# Altium PCB m_airconditioner_PCB.PcbDoc
Units mm, origin at the board's own origin, x right, y up, seen from the top; angles counter-clockwise.
Board outline 200 x 180 mm, 2 copper layers (Top Layer, Bottom Layer); 139 components, 155 nets, 583 pads, 53 vias.
Unrouted connection lines stored in the file: 1.
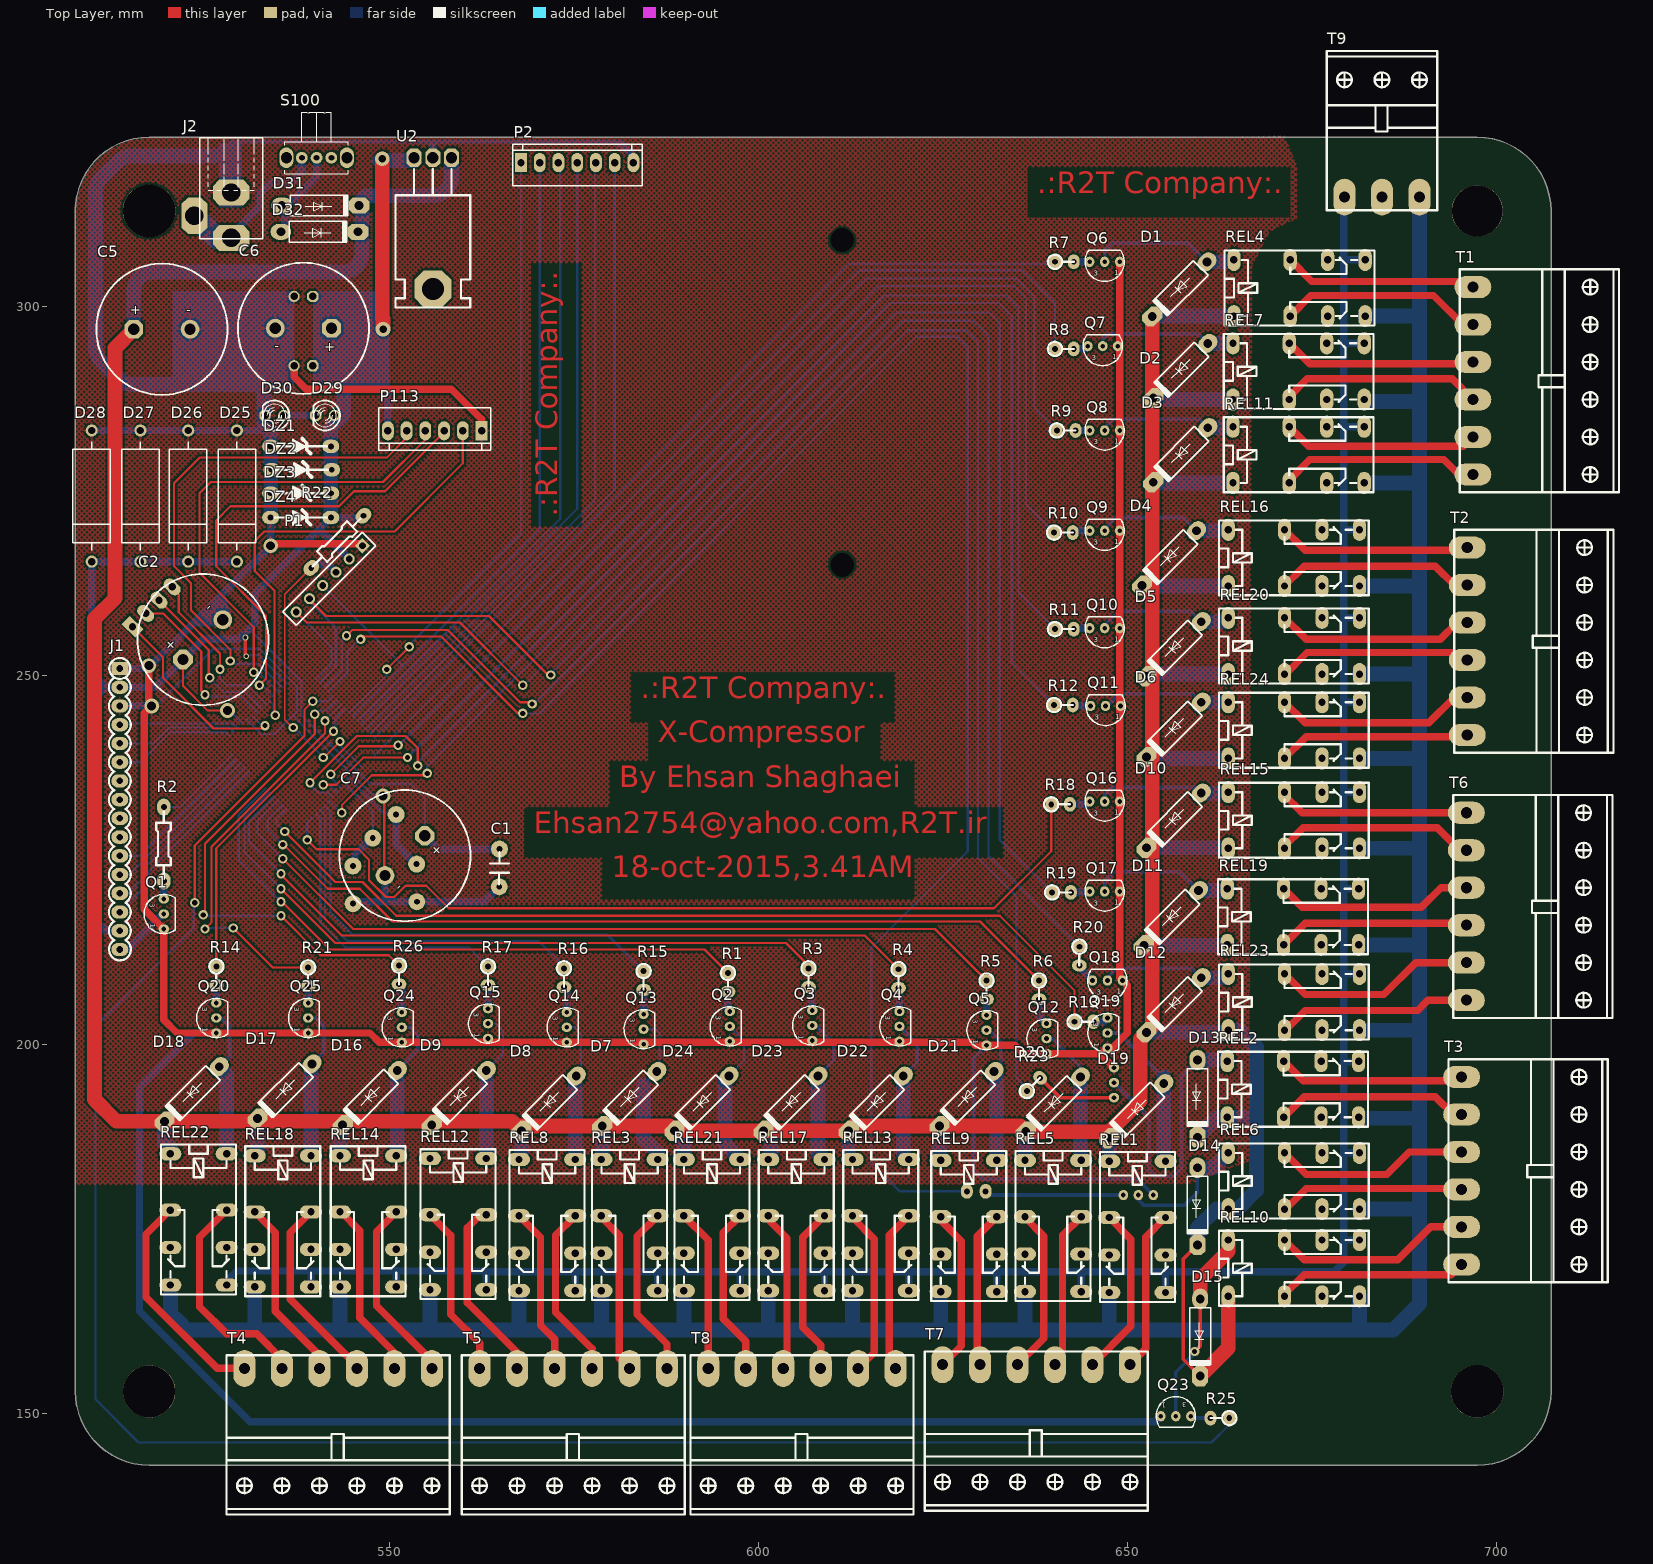
[diagram p0: Top Layer view]
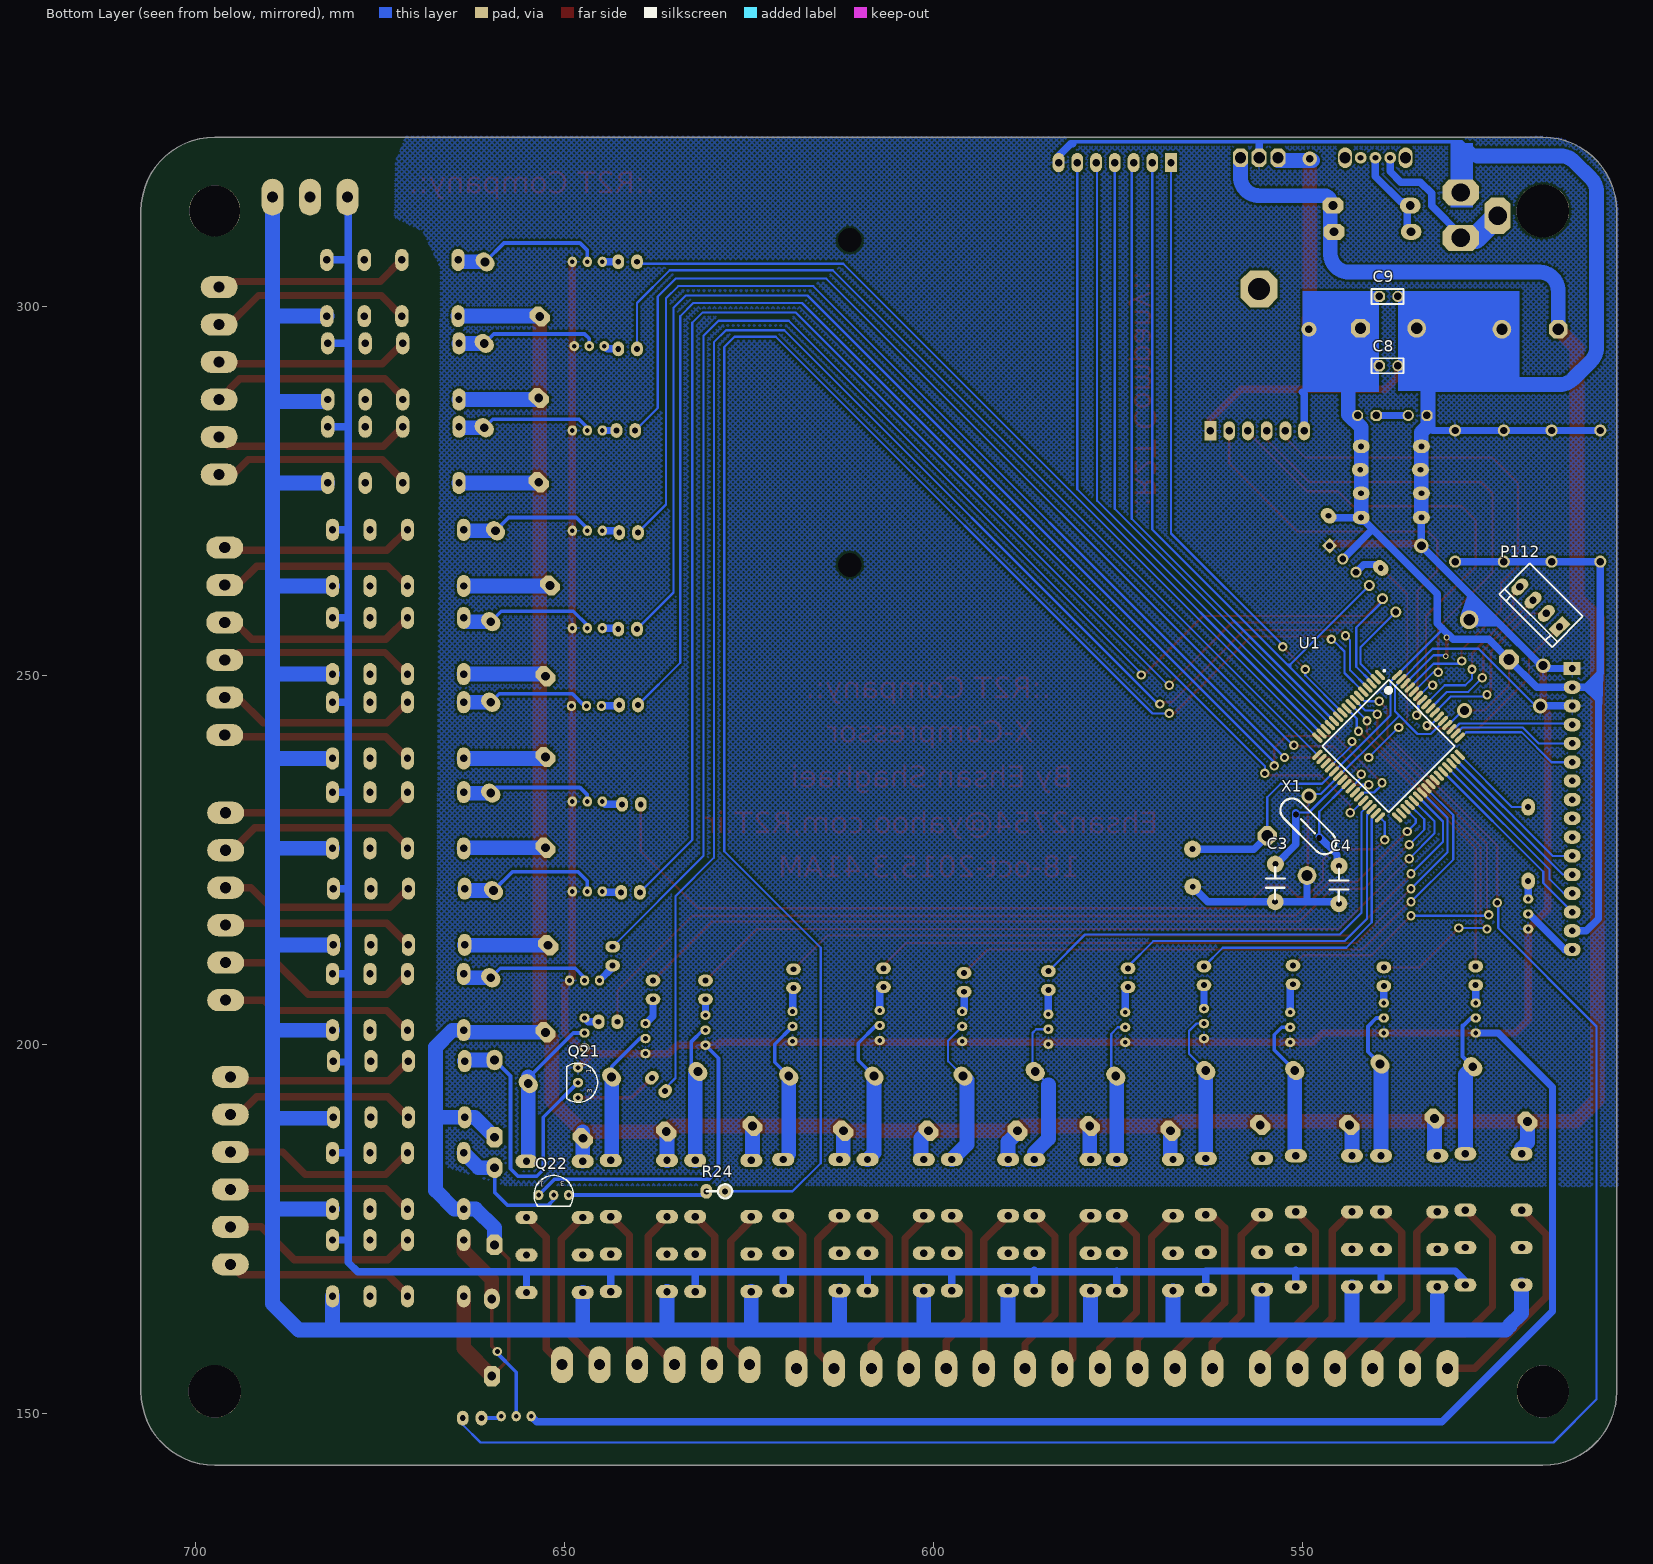
[diagram p1: Bottom Layer view, seen from below]

## Layer stack, top to bottom
Top Solder: solder mask 0.0102, Solder Resist, Dk 3.5
Top Layer: signal copper 0.0356
Dielectric 1: dielectric 0.32, FR-4, Dk 4.8
Bottom Layer: signal copper 0.0356
Bottom Solder: solder mask 0.0102, Solder Resist, Dk 3.5

## Board outline
707.441,312.961 707.386,314.006 707.222,315.04 706.952,316.051 706.576,317.028 706.101,317.961 705.531,318.839 704.872,319.652 704.132,320.392 703.319,321.051 702.441,321.621 701.508,322.097 700.531,322.472 699.52,322.743 698.486,322.906 697.441,322.961 517.441,322.961 516.396,322.906 515.362,322.742 514.351,322.472 513.374,322.096 512.441,321.621 511.563,321.051 510.75,320.392 510.01,319.652 509.351,318.839 508.781,317.961 508.306,317.028 507.93,316.051 507.66,315.04 507.496,314.006 507.441,312.961 507.441,152.961 507.496,151.916 507.66,150.882 507.93,149.871 508.306,148.894 508.781,147.961 509.351,147.083 510.01,146.27 510.75,145.53 511.563,144.871 512.441,144.301 513.374,143.826 514.351,143.45 515.362,143.18 516.396,143.016 517.441,142.961 697.441,142.961 698.486,143.016 699.52,143.18 700.531,143.45 701.508,143.826 702.441,144.301 703.319,144.871 704.132,145.53 704.872,146.27 705.531,147.083 706.101,147.961 706.576,148.894 706.952,149.871 707.222,150.882 707.386,151.916 707.441,152.961

## Design rules (kind name [scope] priority, off if disabled: settings)
Clearance [All] p1: gap=0.254
PolygonConnect [All] p1: connectstyle=Relief reliefconductorwidth=0.254 reliefentries=4 polygonreliefangle="90 Angle" airgapwidth=0.254
RoutingVias [All] p1: holewidth=0.711 width=1.27 viastyle="Through Hole" minholewidth=0.711 minwidth=1.27 maxholewidth=0.711 maxwidth=1.27
SolderMaskExpansion [All] p1: expansion=0.102
Width [All] p1: maxlimit=3 minlimit=0.2 preferedwidth=0.5
29 further rules are at their usual default settings.

## Components (designator, comment, footprint, x,y, rotation, side; value= is the part's Value field where it differs from the comment)
C1 "" RAD_ADA 564.896,221.361 r90 top
C2 "Cap" My_cap3300u 527.431,257.556 r45 top
C3 "CAP" RAD_ADA 553.72,219.329 r90 bottom
C4 "CAP" RAD_ADA 545.084,219.075 r90 bottom
C5 "Cap" My_cap3300u 522.986,296.926 r0 top
C6 "Cap" My_cap3300u 534.543,297.053 r180 top
C7 "Cap" My_cap3300u 549.402,222.885 r225 top
C8 "Cap" My_cap100n 538.353,291.973 r180 bottom
C9 "Cap" My_cap100n 538.353,301.371 r180 bottom
D1 "1N4007" My_DO-41 653.415,298.323 r45 top
D2 "1N4007" My_DO-41 653.542,287.274 r45 top
D3 "1N4007" My_DO-41 653.542,275.844 r45 top
D4 "1N4007" My_DO-41 652.018,261.874 r45 top
D5 "1N4007" My_DO-41 652.653,249.555 r45 top
D6 "1N4007" My_DO-41 652.653,238.633 r45 top
D7 "1N4007" My_DO-41 578.866,188.595 r45 top
D8 "1N4007" My_DO-41 567.944,187.96 r45 top
D9 "1N4007" My_DO-41 555.752,188.722 r45 top
D10 "1N4007" My_DO-41 652.653,226.314 r45 top
D11 "1N4007" My_DO-41 652.272,213.106 r45 top
D12 "1N4007" My_DO-41 652.653,201.295 r45 top
D13 "1N4007" My_DO-41 659.765,187.198 r90 top
D14 "1N4007" My_DO-41 659.765,172.593 r90 top
D15 "1N4007" My_DO-41 660.146,154.813 r90 top
D16 "1N4007" My_DO-41 543.687,188.722 r45 top
D17 "1N4007" My_DO-41 532.13,189.611 r45 top
D18 "1N4007" My_DO-41 519.557,189.23 r45 top
D19 "1N4007" My_DO-41 647.573,186.944 r45 top
D20 "1N4007" My_DO-41 636.27,187.833 r45 top
D21 "1N4007" My_DO-41 624.586,188.595 r45 top
D22 "1N4007" My_DO-41 612.267,187.96 r45 top
D23 "1N4007" My_DO-41 600.71,187.96 r45 top
D24 "1N4007" My_DO-41 588.645,187.96 r45 top
D25 "5V" DIODE-0.7 529.336,274.32 r270 top
D26 "5v" DIODE-0.7 522.732,274.32 r270 top
D27 "5V" DIODE-0.7 516.255,274.32 r270 top
D28 "5V" DIODE-0.7 509.651,274.32 r270 top
D29 "LED" My_LED3MM 541.274,285.242 r180 top
D30 "LED" My_LED3MM 534.416,285.242 r180 top
D31 "1N4007" My_DO-41 546.1,313.944 r180 top
D32 "1N4007" My_DO-41 545.973,310.388 r180 top
DZ1 "ZENER" ZENER 533.908,281.051 r0 top
DZ2 "ZENER" ZENER 534.035,277.876 r0 top
DZ3 "ZENER" ZENER 533.908,274.701 r0 top
DZ4 "ZENER" ZENER 533.908,271.399 r0 top
J1 "SIP16" SIP16 513.461,250.952 r270 top
J2 "DC_Jack" My_DC_Jack 528.574,317.881 r180 top
P1 "Programmer" HDR1X6 546.354,267.589 r225 top
P2 "LHWR" "Polarized Header 7" 575.437,319.913 r0 top
P112 "LHWR" "Polarized Header 4" 518.033,259.188 r45 bottom
P113 "LHWR" "Polarized Header 6" 556.133,282.956 r180 top
Q1 "C945" C945 519.43,217.678 r270 top
Q2 "C945" C945 596.138,202.438 r270 top
Q3 "C945" C945 607.314,202.565 r270 top
Q4 "C945" C945 619.125,202.438 r270 top
Q5 "C945" C945 630.936,201.93 r270 top
Q6 "C945" C945 646.938,306.07 r0 top
Q7 "C945" C945 646.684,294.64 r0 top
Q8 "C945" C945 646.938,283.21 r0 top
Q9 "C945" C945 646.938,269.621 r0 top
Q10 "C945" C945 646.938,256.413 r0 top
Q11 "C945" C945 647.065,245.872 r0 top
Q12 "C945" C945 639.064,200.787 r270 top
Q13 "C945" C945 584.454,202.057 r270 top
Q14 "C945" C945 574.04,202.311 r270 top
Q15 "C945" C945 563.372,202.819 r270 top
Q16 "C945" C945 646.938,232.918 r0 top
Q17 "C945" C945 646.938,220.726 r0 top
Q18 "C945" C945 647.319,208.661 r0 top
Q19 "C945" C945 647.319,201.549 r270 top
Q20 "C945" C945 526.542,203.581 r270 top
Q21 "C945" C945 648.208,194.818 r90 bottom
Q22 "C945" C945 651.51,179.578 r0 bottom
Q23 "C945" C945 656.59,149.606 r180 top
Q24 "C945" C945 551.688,202.311 r270 top
Q25 "C945" C945 538.988,203.581 r270 top
R1 "RES" AXIAL_V 595.884,209.677 r270 top
R2 "RES" AXIAL0.4 519.43,232.156 r270 top
R3 "RES" AXIAL_V 606.806,210.312 r270 top
R4 "RES" AXIAL_V 618.998,210.185 r270 top
R5 "RES" AXIAL_V 630.936,208.661 r270 top
R6 "RES" AXIAL_V 638.048,208.661 r270 top
R7 "RES" AXIAL_V 640.207,306.07 r0 top
R8 "RES" AXIAL_V 640.207,294.259 r0 top
R9 "RES" AXIAL_V 640.461,283.21 r0 top
R10 "RES" AXIAL_V 640.08,269.367 r0 top
R11 "RES" AXIAL_V 640.207,256.286 r0 top
R12 "RES" AXIAL_V 640.08,245.999 r0 top
R13 "RES" AXIAL_V 642.874,203.073 r0 top
R14 "RES" AXIAL_V 526.542,210.566 r270 top
R15 "RES" AXIAL_V 584.454,209.931 r270 top
R16 "RES" AXIAL_V 573.659,210.312 r270 top
R17 "RES" AXIAL_V 563.372,210.566 r270 top
R18 "RES" AXIAL_V 639.699,232.537 r0 top
R19 "RES" AXIAL_V 639.826,220.599 r0 top
R20 "RES" AXIAL_V 643.509,213.233 r270 top
R21 "RES" AXIAL_V 538.988,210.439 r270 top
R22 "RES" AXIAL0.4 546.481,271.653 r225 top
R23 "RES" AXIAL_V 636.397,193.675 r45 top
R24 "RES" AXIAL_V 628.269,180.086 r0 bottom
R25 "RES" AXIAL_V 663.829,149.352 r180 top
R26 "RES" AXIAL_V 551.307,210.693 r270 top
REL1 "RELAY" RELAY1 647.573,184.15 r270 top
REL2 "RELAY" RELAY1 663.575,190.119 r0 top
REL3 "RELAY" RELAY1 578.739,184.404 r270 top
REL4 "RELAY" RELAY1 664.464,298.704 r0 top
REL5 "RELAY" RELAY1 636.143,184.277 r270 top
REL6 "RELAY" RELAY1 663.702,177.673 r0 top
REL7 "RELAY" RELAY1 664.337,287.401 r0 top
REL8 "RELAY" RELAY1 567.563,184.404 r270 top
REL9 "RELAY" RELAY1 624.713,184.277 r270 top
REL10 "RELAY" RELAY1 663.702,165.862 r0 top
REL11 "RELAY" RELAY1 664.337,276.098 r0 top
REL12 "RELAY" RELAY1 555.498,184.531 r270 top
REL13 "RELAY" RELAY1 612.775,184.404 r270 top
REL14 "RELAY" RELAY1 543.306,184.912 r270 top
REL15 "RELAY" RELAY1 663.702,226.568 r0 top
REL16 "RELAY" RELAY1 663.702,262.128 r0 top
REL17 "RELAY" RELAY1 601.345,184.404 r270 top
REL18 "RELAY" RELAY1 531.749,184.912 r270 top
REL19 "RELAY" RELAY1 663.575,213.487 r0 top
REL20 "RELAY" RELAY1 663.702,250.19 r0 top
REL21 "RELAY" RELAY1 589.915,184.404 r270 top
REL22 "RELAY" RELAY1 520.319,185.166 r270 top
REL23 "RELAY" RELAY1 663.702,201.93 r0 top
REL24 "RELAY" RELAY1 663.702,238.76 r0 top
S100 "Switch SPDT_Subminiator" "SPDT Subminiator" 540.131,320.167 r0 top
T1 "PHONIX6" PHONIX6 696.849,302.641 r270 top
T2 "PHONIX6" PHONIX6 696.087,267.335 r270 top
T3 "PHONIX6" PHONIX6 695.325,195.58 r270 top
T4 "PHONIX6" PHONIX6 555.752,156.083 r180 top
T5 "PHONIX6" PHONIX6 587.629,156.083 r180 top
T6 "PHONIX6" PHONIX6 695.96,231.394 r270 top
T7 "PHONIX6" PHONIX6 650.367,156.591 r180 top
T8 "PHONIX6" PHONIX6 618.617,156.083 r180 top
T9 "PHONIX3" PHONIX3 679.45,314.833 r0 top
U1 "ATmega64-16AC" 64A_N 538.353,240.411 r225 bottom
U2 "7805" My_TO-220 558.419,320.167 r180 top
X1 "XTAL" XTAL_1 547.751,227.965 r315 bottom

## Footprints (in the part's own frame and the unit in brackets; to place one, negate y for a bottom-side part, rotate by r counter-clockwise, add the part's x,y. Pads: shape width x height; smd on the part's side, far side on the other; paste and mask are expansions set on the pad)
64A_N [mm] "Thin QFP, 64-Leads, Body 14x14mm, Pitch 0.8mm, IPC Medium Density"
  oval 1.75x0.55 smd: 1(-7.65,6) 2(-7.65,5.2) 3(-7.65,4.4) 4(-7.65,3.6) 5(-7.65,2.8) 6(-7.65,2) 7(-7.65,1.2) 8(-7.65,0.4) 9(-7.65,-0.4) 10(-7.65,-1.2) 11(-7.65,-2) 12(-7.65,-2.8) 13(-7.65,-3.6) 14(-7.65,-4.4) 15(-7.65,-5.2) 16(-7.65,-6) 33(7.65,-6) 34(7.65,-5.2) 35(7.65,-4.4) 36(7.65,-3.6) 37(7.65,-2.8) 38(7.65,-2) 39(7.65,-1.2) 40(7.65,-0.4) 41(7.65,0.4) 42(7.65,1.2) 43(7.65,2) 44(7.65,2.8) 45(7.65,3.6) 46(7.65,4.4) 47(7.65,5.2) 48(7.65,6)
  oval 0.55x1.75 smd: 17(-6,-7.65) 18(-5.2,-7.65) 19(-4.4,-7.65) 20(-3.6,-7.65) 21(-2.8,-7.65) 22(-2,-7.65) 23(-1.2,-7.65) 24(-0.4,-7.65) 25(0.4,-7.65) 26(1.2,-7.65) 27(2,-7.65) 28(2.8,-7.65) 29(3.6,-7.65) 30(4.4,-7.65) 31(5.2,-7.65) 32(6,-7.65) 49(6,7.65) 50(5.2,7.65) 51(4.4,7.65) 52(3.6,7.65) 53(2.8,7.65) 54(2,7.65) 55(1.2,7.65) 56(0.4,7.65) 57(-0.4,7.65) 58(-1.2,7.65) 59(-2,7.65) 60(-2.8,7.65) 61(-3.6,7.65) 62(-4.4,7.65) 63(-5.2,7.65) 64(-6,7.65)
  silkscreen extent -7.77,-6.35 6.35,6.95, body extent -7,-7 7,7, height 1.2
AXIAL0.4 [mm]
  oval 2.3x1.8 hole 0.8: 1(0,0) 2(10.008,0)
  silkscreen extent 0.58,-1.04 9.75,0.94
AXIAL_V [mm]
  oval 1.6x2 hole 0.8: 1(0,0) 2(2.54,0)
  silkscreen extent -0.96,-0.96 2.54,0.96
C945 [mil] "NPN Transistor"
  oval 50x55 hole 25: 1(80,0) 2(0,0) 3(-80,0)
  silkscreen extent -105,-105 105,61, body extent -94,-96 95,58, height 315
DIODE-0.7 [mm] "Diode, Thru-Hole; 2 Leads; 0.7 in Pin Spacing"
  round 1.65 hole 1: 1(-8.89,0) 2(8.89,0)
  silkscreen extent -7.37,-2.54 7.37,2.54
HDR1X6 [mm] "Connector; Header; 6 Position"
  rect 1.5x1.5 hole 0.9: 1(0,0)
  round 1.5 hole 0.9: 2(2.54,0) 3(5.08,0) 4(7.62,0) 5(10.16,0) 6(12.7,0)
  silkscreen extent -1.27,-1.27 13.97,1.27
My_cap100n [mil]
  oct 60x60 hole 40: 1(-50,0)
  round 60 hole 40: 2(50,0)
  silkscreen extent -90,-40 80,40
My_cap3300u [mil]
  oct 100x100 hole 60: +(-300,0)
  round 100 hole 60: -(0,0)
  silkscreen extent -500,-350 200,350
My_DC_Jack [mm]
  oct 5x3.5 hole 2.5: 1(0,8.57) 3(0,2.42)
  oct 3.5x5 hole 2.5: 2(5,5.57)
  silkscreen extent -4.25,-4.98 4.25,8.67
My_DO-41 [mil]
  oval 110x85 hole 47.24: A(420.71,10)
  oct 110x85 hole 47.24: K(8.9,10)
  silkscreen extent 64,-45 375,65
My_LED3MM [mil]
  round 60 hole 40: A(-50,0)
  oct 60x60 hole 40: K(50,0)
  silkscreen extent -80,-80 62,80
My_TO-220 [mil]
  oct 196.85x196.85 hole 118.11: 0(99.49,699.49)
  oct 80x100 hole 60: 1(-0.5,-0.5) 2(99.5,-0.5) 3(199.5,-0.5)
  silkscreen extent -101,60 300,800
PHONIX3 [mm]
  oval 3x5 hole 1.5: 1(0,0) 2(5.08,0) 3(10.16,0)
  silkscreen extent -2.41,-1.78 12.57,19.81
PHONIX6 [mm]
  oval 3x5 hole 1.5: 1(0,0) 2(5.08,0) 3(10.16,0) 4(15.24,0) 5(20.32,0) 6(25.4,0)
  silkscreen extent -2.41,-1.78 27.81,19.81
"Polarized Header 4" [mm]
  rect 1.6x2.6 hole 1: 1(-3.84,-0.2)
  oval 1.6x2.6 hole 1: 2(-1.3,-0.2) 3(1.24,-0.2) 4(3.78,-0.2)
  silkscreen extent -5.1,-3.42 5.05,2.45, body extent -5.06,-3.43 5.1,2.37, height 10.75
"Polarized Header 6" [mm]
  rect 1.6x2.6 hole 1: 1(-6.36,-0.205)
  oval 1.6x2.6 hole 1: 2(-3.82,-0.205) 3(-1.28,-0.205) 4(1.26,-0.205) 5(3.8,-0.205) 6(6.34,-0.205)
  silkscreen extent -7.6,-3.3 7.6,2.42, body extent -7.62,-3.32 7.62,2.48, height 10.75
"Polarized Header 7" [mm]
  rect 1.6x2.6 hole 1: 1(-7.605,-0.405)
  oval 1.6x2.6 hole 1: 2(-5.065,-0.405) 3(-2.525,-0.405) 4(0.015,-0.405) 5(2.555,-0.405) 6(5.095,-0.405) 7(7.635,-0.405)
  silkscreen extent -8.75,-3.52 8.85,2.07, body extent -8.84,-3.62 8.94,2.17, height 10.75
RAD_ADA [mm]
  round 2.3 hole 0.8: 1(0,0) 2(5.105,-0.026)
  silkscreen extent 0.33,-1.3 4.72,1.24
RELAY1 [mm]
  oval 1.8x3 hole 1: 1(0,0) 2(0,7.62) 3(7.62,7.62) 4(7.62,0) 5(17.78,7.62) 6(12.7,7.62) 7(17.78,0) 8(12.7,0)
  silkscreen extent -1.27,-1.27 19.05,8.89
SIP16 [mm]
  rect 1.8x2.3 hole 0.9: 1(0,0)
  oval 1.8x2.3 hole 0.9: 2(2.54,0) 3(5.08,0) 4(7.62,0) 5(10.16,0) 6(12.7,0) 7(15.24,0) 8(17.78,0) 9(20.32,0) 10(22.86,0) 11(25.4,0) 12(27.94,0) 13(30.48,0) 14(33.02,0) 15(35.56,0) 16(38.1,0)
  silkscreen extent -1.42,-1.48 39.56,1.5
"SPDT Subminiator" [mm] "Subminiator SPDT switch"
  round 1.6 hole 0.8: 1(2,0) 2(0,0) 3(-2,0)
  oval 1.9x2.8 hole 1.5: M2(-4.1,0) M2(4.1,0)
  silkscreen extent -4.3,-2.2 4.3,6.2, body extent -4.31,-2.28 4.3,6.09, height 4.7
XTAL_1 [mm]
  round 0 / inner round 0 / far side round 2.3 hole 0.8: 1(0,0) 2(-0.025,-4.496)
  silkscreen extent -1.65,-6.85 1.5,2.52
ZENER [mm]
  oval 2.3x1.8 hole 0.8: 1(0,0) 2(8.153,0)
  silkscreen extent 0.53,-0.97 7.65,1.07

## Part data
C1: library part CAP
C2 C5 C6 C7: library part "Cap Pol", "CAP-3300Uf"
C8 C9: library part "Cap ceramic", "CAP-100Nf"
D1 D2 D3 D4 D5 D6 D7 D8 D9 D10 D11 D12 D13 D14 D15 D16 D17 D18 D19 D20 D21 D22 D23 D24 D31 D32: "1 Amp Diode"
D25 D26 D27 D28: library part "D Zener", "Zener Diode"
D29 D30: "Typical INFRARED GaAs LED"
P1: library part "Header 6", "Header, 6-Pin"
P2: library part "7pin LHWR"
P112: library part "4pin LHWR"
P113: library part "6pin LHWR"
Q1 Q2 Q3 Q4 Q5 Q6 Q7 Q8 Q9 Q10 Q11 Q12 Q13 Q14 Q15 Q16 Q17 Q18 Q19 Q20 Q21 Q22 Q23 Q24 Q25: "NPN Transistor"
S100: "Subminiator SPDT Switch"
U1: "8-Bit AVR Microcontroller with 64K Bytes of In-System Programmable Flash Memory"
U2: "Regulator"

## Free pads (board coordinates)
  round 7.064 hole 7.064: 1(517.441,152.961)
  round 7.152 hole 7.152: 1(517.441,312.961)
  round 7.115 hole 7.115: 1(697.441,152.961)
  round 6.9 hole 6.9: 1(697.441,312.961)
  round 1.524 hole 3.24: 7(611.378,309) 8(611.378,265)

## Via types
v1: diameter 1.27, hole 0.711, Top Layer to Bottom Layer, 44 vias
v2: diameter 2, hole 1.2, Top Layer to Bottom Layer, 5 vias
v3: diameter 0.8, hole 0.5, Top Layer to Bottom Layer, 2 vias
v4: diameter 2, hole 1, Top Layer to Bottom Layer, 2 vias

## Nets (pads, with @x,y where several pads share a name; then routed paths per layer and width w, separated by ;. In a path a pad name is that pad's centre, name@x,y a point inside that pad or via, vN(x,y) a via of type N, cw(c..) or ccw(c..) an arc to the next point about the centre after c; other vN are vias at no path point)
+12: C5.+ D1.K D2.K D3.K D4.K D5.K D6.K D7.K D8.K D9.K D10.K D11.K D12.K D13.K D14.K D15.K D16.K D17.K D18.K D19.K D20.K D21.K D22.K D23.K D24.K D31.K D32.K REL1.1 REL2.1 REL3.1 REL4.1 REL5.1 REL6.1 REL7.1 REL8.1 REL9.1 REL10.1 REL11.1 REL12.1 REL13.1 REL14.1 REL15.1 REL16.1 REL17.1 REL18.1 REL19.1 REL20.1 REL21.1 REL22.1 REL23.1 REL24.1 U2.1 | length 645.3
  Top Layer w0.5: D14.K 657.606,170.914 657.606,157.325 D15.K
  Top Layer w2: C5.+ 512.826,294.386 512.826,260.477 510.032,257.683 510.032,192.532 512.995,189.569 D18.K 566.654,189.569 567.289,188.934 D7.K 587.99,188.934 D24.K D23.K D22.K 612.882,188.934 D21.K 635.488,188.934 D20.K 647.553,188.172 651.764,192.383 651.764,200.765 D12.K 653.395,202.396 D1.K ; D15.K 663.702,158.849 REL10.1
  Bottom Layer w2: C5.+ 515.366,302.133 cw(c517.906,302.133) 517.906,304.673 543.715,304.673 ccw(c543.715,307.213) 546.255,307.213 546.255,314.198 cw(c547.081,314.198) 547.081,315.024 555.892,315.024 ccw(c555.892,317.563) 556.924,315.243 ccw(c555.892,317.563) 558.213,316.532 ccw(c555.892,317.563) 558.432,317.563 U2.1 ; D18.K 519.537,186.71 520.319,185.928 REL22.1 ; REL18.1 532.11,185.273 D17.K ; REL14.1 543.306,188.7 D16.K ; REL8.1@567.924,184.765 D8.K ; REL3.1@578.846,184.511 D7.K ; D24.K 588.625,188.107 589.915,186.817 REL21.1 ; D23.K 601.726,187.264 REL17.1@601.726,184.785 ; REL13.1@612.247,184.932 D22.K ; REL9.1@624.566,184.424 D21.K ; REL5.1 636.143,188.065 D20.K ; D19.K@647.553,188.172 647.573,188.153 REL1.1 ; D4.K@652.084,262.128 REL16.1 ; D11.K 663.533,213.445 REL19.1 ; D12.K 663.406,201.634 REL23.1 665.226,201.93 667.512,199.644 667.512,190.119 ; D10.K 663.617,226.653 REL15.1 ; D6.K@652.846,238.76 REL24.1 ; D5.K@652.929,250.19 REL20.1 ; D1.K@653.437,298.704 REL4.1 ; D3.K@653.608,276.098 REL11.1 ; D2.K@653.735,287.401 REL7.1 ; D14.K 659.511,175.133 662.051,177.673 REL6.1 664.972,177.673 667.512,180.213 667.512,190.119 ; D13.K 662.206,190.119 REL2.1 667.512,190.119
ADC1: P113.5 U1.61 | length 70.8
  Top Layer w0.3: v1(528.447,251.968) 528.447,253.492 523.113,258.826 523.113,262.509 520.827,264.795 520.827,276.098 524.256,279.527 549.656,279.527 552.333,282.204 P113.5
  Bottom Layer w0.3: v1(528.447,251.968) 528.828,251.587 532.268,251.587 U1.61
ADC2: P113.4 U1.60 | length 66.5
  Top Layer w0.3: v1(531.622,250.444) 531.622,256.54 524.256,263.906 524.256,274.701 525.78,276.225 549.148,276.225 554.873,281.95 P113.4
  Bottom Layer w0.3: v1(531.622,250.444) 532.28,250.444 U1.60
ADC3: P113.3 U1.59 | length 64.1
  Top Layer w0.3: v1(532.384,248.666) 533.273,249.555 533.273,258.064 526.542,264.795 526.542,271.018 528.447,272.923 543.179,272.923 545.211,274.955 549.402,274.955 557.413,282.966 P113.3
  Bottom Layer w0.3: v1(532.384,248.666) 532.755,248.666 534.187,247.235 U1.59
ADC4: P113.2 U1.58 | length 64.1
  Top Layer w0.3: v1(534.543,244.602) 534.416,244.729 534.416,261.493 531.749,264.16 531.749,268.224 533.019,269.494 550.692,269.494 559.953,278.755 P113.2
  Bottom Layer w0.3: U1.58 533.792,246.498 534.33,245.96 534.33,244.815 v1(534.543,244.602)
ADC5: P112.4 U1.57 | length 22.8
  Top Layer w0.3: P112.4 520.564,261.883 521.462,260.985 521.462,258.572 527.05,252.984 v1(527.05,250.825)
  Bottom Layer w0.3: v1(527.05,250.825) 527.05,249.555 527.939,248.666 530.733,248.666 533.226,246.173 U1.57
ADC6: P112.3 U1.56 | length 22.1
  Top Layer w0.3: P112.3 525.526,253.449 525.526,249.809 v1(525.653,249.682)
  Bottom Layer w0.3: v1(525.653,249.682) 527.558,247.777 530.421,247.777 U1.56
ADC7: P112.2 U1.55 | length 23.8
  Top Layer w0.3: P112.2 519.338,258.41 524.51,253.238 524.51,247.904 v1(525.018,247.396)
  Bottom Layer w0.3: v1(525.018,247.396) 525.272,247.142 529.925,247.142 U1.55
ADC8: P112.1 U1.54 | length 27.8
  Top Layer w0.3: P112.1 519.303,252.487 519.303,249.682 526.161,242.824 533.146,242.824 v1(533.146,243.205)
  Bottom Layer w0.3: U1.54 532.731,243.205 v1(533.146,243.205)
CM1: R7.1 U1.16 | length 118.9
  Bottom Layer w0.3: U1.16 612.243,305.816 639.953,305.816 R7.1
CM2: R8.1 U1.17 | length 127.5
  Bottom Layer w0.3: U1.17 613.688,304.927 635.762,304.927 640.207,300.482 R8.1
CM3: R9.1 U1.25 | length 146.4
  Top Layer w0.3: v1(542.036,236.601) 545.846,240.411 551.307,240.411 v1(551.18,240.538)
  Bottom Layer w0.3: v1(542.036,236.601) 542.036,236.162 U1.25 ; v1(551.18,240.538) v1@551.307,240.411 ; v1@551.307,240.538 614.553,303.784 635,303.784 637.413,301.371 637.413,286.258 R9.1
CM4: R10.1 U1.26 | length 159.6
  Top Layer w0.3: v1(541.02,235.204) 542.798,235.204 546.458,238.864 552.427,238.864 v1(552.45,238.887)
  Bottom Layer w0.3: v1(541.02,235.204) 541.863,235.204 U1.26 ; v1(552.45,238.887) 616.331,302.768 634.619,302.768 636.27,301.117 636.27,273.177 R10.1
CM5: R11.1 U1.27 | length 179
  Top Layer w0.3: v1(539.242,235.458) 545.592,241.808 552.196,241.808 553.847,240.157 v1(553.847,237.744)
  Bottom Layer w0.3: v1(539.242,235.458) 539.242,235.204 540.321,234.125 541.639,234.125 542.177,233.587 U1.27 ; v1(553.847,237.744) 553.593,237.998 617.093,301.498 633.603,301.498 635.254,299.847 635.254,261.239 R11.1
CM6: R12.1 U1.28 | length 178.9
  Top Layer w0.3: v1(543.56,231.394) 543.56,232.41 547.624,236.474 554.863,236.474 v1(555.117,236.728)
  Bottom Layer w0.3: U1.28 543.41,231.394 v1(543.56,231.394) ; v1(555.117,236.728) 555.117,237.744 617.855,300.482 632.587,300.482 634.365,298.704 634.365,251.714 R12.1
CM7: R15.1 U1.29 | length 60.7
  Bottom Layer w0.3: U1.29 541.217,232.285 542.036,231.466 542.036,217.805 544.957,214.884 579.501,214.884 R15.1
CM8: R16.1 U1.30 | length 50.4
  Bottom Layer w0.3: U1.30 540.651,231.719 541.274,231.096 541.274,217.043 544.322,213.995 570.23,213.995 573.659,210.566 R16.1
CM9: R17.1 U1.31 | length 40.2
  Bottom Layer w0.3: U1.31 540.085,231.154 540.623,230.616 540.623,216.551 544.068,213.106 560.832,213.106 R17.1
CM10: R18.1 U1.32 | length 120.5
  Top Layer w0.3: v1(538.861,227.711) 540.131,226.441 545.846,226.441 547.243,225.044 547.243,222.25 549.529,219.964 550.672,219.964 552.196,221.488 554.99,221.488 558.038,218.44 631.952,218.44 639.699,226.187 R18.1
  Bottom Layer w0.3: v1(538.861,227.711) 538.861,230.1 U1.32
CM11: P1.6 R19.1 U1.2 | length 213.5
  Top Layer w0.3: P1.6 538.807,257.175 559.562,257.175 v1(568.071,248.666)
  Bottom Layer w0.3: P1.6@537.12,258.863 P1.6 542.163,253.819 542.163,251.575 U1.2 ; v1(568.071,248.666) 568.198,248.666 618.744,299.212 631.317,299.212 632.714,297.815 632.714,227.711 R19.1
CM12: P1.5 R20.1 U1.3 | length 218.5
  Top Layer w0.3: P1.5 539.17,260.295 541.401,258.064 563.499,258.064 v1@571.69,249.873
  Bottom Layer w0.3: P1.5@538.916,260.659 538.916,260.295 542.717,256.494 542.717,251.169 540.651,249.103 U1.3 ; 572.198,250.635 619.633,298.069 629.158,298.069 631.19,296.037 631.19,225.552 R20.1
  other v1: 571.881,250.063
CM13: R23.1 U1.4 | length 224
  Top Layer w0.3: v1@544.322,255.524 544.957,256.159 557.911,256.159 567.69,246.38 569.087,246.38 v1(569.341,246.126)
  Bottom Layer w0.3: U1.4 543.56,250.709 543.56,254.762 v1(544.195,255.397) ; v1(569.341,246.126) 569.595,246.126 620.268,296.799 628.142,296.799 629.793,295.148 629.793,225.298 635,220.091 635,195.453 636.397,194.056 R23.1
CM14: R24.1 U1.5 | length 248.4
  Top Layer w0.3: v1@546.608,254.889 v1(546.1,254.889) 546.481,255.27 557.022,255.27 567.436,244.856 v1(568.071,244.856)
  Bottom Layer w0.3: U1.5 544.322,250.34 544.322,253.238 545.592,254.508 ; v1(546.1,254.889) v1@546.608,254.889 ; v1(568.071,244.856) 570.357,244.856 621.411,295.91 626.999,295.91 628.396,294.513 628.396,226.187 615.315,213.106 615.315,183.896 619.125,180.086 R24.1
CM15: R25.1 U1.6 | length 267.8
  Top Layer w0.3: v1(523.621,219.202) 523.621,226.949 538.48,241.808 538.48,245.364 v1(539.623,246.507)
  Bottom Layer w0.3: v1(523.621,219.202) 523.494,219.075 523.494,215.773 510.159,202.438 510.159,151.892 516.001,146.05 661.416,146.05 663.829,148.463 R25.1 ; v1(539.623,246.507) 541.621,246.507 U1.6
CM16: R26.1 U1.7 | length 66.7
  Top Layer w0.3: v1(524.764,217.551) 525.018,217.805 525.018,227.203 539.877,242.062 v1(539.877,244.729) ; v1(535.305,217.424) 540.639,212.09 549.91,212.09 R26.1
  Bottom Layer w0.3: v1(524.764,217.551) 524.891,217.424 v1(535.305,217.424) ; v1(539.877,244.729) 540.385,245.237 541.482,245.237 U1.7
CM17: R21.1 U1.8 | length 54.3
  Top Layer w0.3: v1(525.018,215.646) 525.907,216.535 525.907,226.822 541.274,242.189 v1(541.274,243.84) ; v1(528.828,215.773) 534.162,210.439 R21.1
  Bottom Layer w0.3: v1(525.018,215.646) 525.145,215.773 v1(528.828,215.773) ; v1@541.245,243.869 U1.8
CM18: R14.1 U1.9 | length 42.2
  Top Layer w0.3: R14.1 526.542,226.568 v1(542.417,242.443)
  Bottom Layer w0.3: v1(542.417,242.443) 542.671,242.697 542.671,244.163 U1.9
CM19: R13.1 U1.35 | length 124.3
  Top Layer w0.3: v1(535.813,228.854) 542.671,221.996 546.354,221.996 550.926,217.424 632.714,217.424 642.874,207.264 R13.1
  Bottom Layer w0.3: v1(535.813,228.854) 534.67,229.997 534.67,230.505 U1.35
CM20: R6.1 U1.36 | length 117.3
  Top Layer w0.3: v1(535.559,227.076) 535.686,227.076 541.655,221.107 545.973,221.107 550.418,216.662 630.047,216.662 R6.1
  Bottom Layer w0.3: U1.36@535.489,232.285 U1.36 535.478,232.456 533.527,230.505 533.527,229.108 v1(535.559,227.076)
CM21: R5.1 U1.37 | length 112.6
  Top Layer w0.3: v1(535.559,225.171) 545.084,215.646 623.951,215.646 R5.1
  Bottom Layer w0.3: U1.37 532.13,230.228 532.13,228.6 v1(535.559,225.171)
CM22: R4.1 U1.38 | length 102.9
  Top Layer w0.3: v1(535.305,223.139) 535.178,223.139 543.56,214.757 614.426,214.757 R4.1
  Bottom Layer w0.3: U1.38 530.987,230.217 530.987,227.457 v1(535.305,223.139)
CM23: R3.1 U1.39 | length 92.7
  Top Layer w0.3: v1(535.305,221.107) 542.671,213.741 603.758,213.741 606.806,210.693 R3.1
  Bottom Layer w0.3: U1.39 530.352,230.713 530.352,226.06 v1(535.305,221.107)
CM24: R1.1 U1.40 | length 83.8
  Top Layer w0.3: v1(535.305,219.329) 535.432,219.329 541.909,212.852 592.709,212.852 R1.1
  Bottom Layer w0.3: U1.40 529.59,231.082 529.59,225.044 v1(535.305,219.329)
F: REL1.5 REL2.5 REL3.5 REL4.5 REL5.5 REL6.5 REL7.5 REL8.5 REL9.5 REL10.5 REL11.5 REL12.5 REL13.5 REL14.5 REL15.5 REL16.5 REL17.5 REL18.5 REL19.5 REL20.5 REL21.5 REL22.5 REL23.5 REL24.5 T9.1 | length 350.2
  Bottom Layer w1: REL22.5 527.939,167.894 529.336,169.291 539.369,169.291 ; REL18.5 539.369,169.291 ; REL14.5 550.926,169.418 ; REL12.5 563.118,169.291 539.369,169.291 ; 563.118,169.164 597.535,169.164 REL21.5 ; REL8.5 575.183,169.291 ; REL3.5 586.359,169.418 ; 597.662,169.164 620.395,169.164 ; REL17.5 608.965,168.91 ; REL13.5 620.395,169.164 ; REL9.5 632.333,169.037 ; REL5.5 643.763,168.783 ; REL1.5 655.193,168.783 ; T9.1@679.323,314.579 679.323,306.324 ; 679.45,185.293 REL6.5 ; 679.45,197.612 REL2.5@681.482,197.612 ; 679.45,221.107 REL19.5 ; 679.45,246.38 REL24.5 ; 679.45,257.81 REL20.5 ; 679.45,269.748 REL16.5 ; 679.45,283.718 REL11.5 ; 679.577,173.482 REL10.5 ; 679.577,234.188 REL15.5 ; 679.577,295.021 REL7.5 ; REL23.5 679.323,209.55 ; REL4.5 679.323,306.324 ; 620.395,169.164 678.053,169.164 679.323,170.434 679.323,209.55 ; 679.323,209.55 679.323,306.324
GND: C1.1 C2.- C3.1 C4.1 C5.- C6.- C7.- C8.2 C9.2 D25.1 D26.1 D27.1 D28.1 D30.K DZ1.1 DZ2.1 DZ3.1 DZ4.1 J1.1 J1.3 J2.3 P1.1 P2.7 P113.1 Q1.1 Q2.1 Q3.1 Q4.1 Q5.1 Q6.1 Q7.1 Q8.1 Q9.1 Q10.1 Q11.1 Q12.1 Q13.1 Q14.1 Q15.1 Q16.1 Q17.1 Q18.1 Q19.1 Q20.1 Q21.1 Q22.1 Q23.1 Q24.1 Q25.1 U1.22 U1.53 U1.63 U2.2 | length 887.4
  Top Layer w0.3: v2(549.148,233.68) 549.305,233.523 C7.-@549.305,222.982
  Top Layer w1: v2@517.398,246.253 v2(517.398,251.333) ; v2(517.779,245.872) 516.763,244.856 516.763,218.313 Q1.1 519.43,203.327 521.208,201.549 Q20.1 Q25.1 547.37,201.549 548.64,200.279 Q24.1 Q14.1 629.031,200.279 629.412,199.898 Q5.1 634.746,199.898 635.889,198.755 Q12.1 646.557,198.755 Q19.1 647.954,199.517 649.986,201.549 649.986,208.026 Q18.1 648.97,209.042 Q17.1 Q16.1 Q10.1 Q9.1 Q8.1 Q6.1 ; v2@534.162,267.843 P1.1@546.1,267.843 ; C8.2 537.083,290.449 538.734,288.798 558.419,288.798 562.493,284.724 P113.1 ; 646.557,198.501 Q21.1
  Bottom Layer w0.3: v2(517.779,245.872) 518.414,245.872 526.161,253.619 532.384,253.619 537.464,248.539 537.464,245.11 534.416,242.062 532.615,242.062 U1.53@530.583,244.094 ; 536.973,244.492 547.531,233.934 v2@548.64,233.934
  Bottom Layer w0.5: 527.685,321.564 528.447,322.326 580.898,322.326 581.152,322.072 ; Q5.1 629.158,198.12 629.158,183.007 630.428,181.737 651.383,181.737 Q22.1
  Bottom Layer w1: D28.1 D27.1 D26.1 D25.1 532.384,283.21 ; J1.3 v2(517.779,245.872) ; J1.1 517.271,250.952 523.875,257.556 ; C5.- 534.416,296.926 534.416,294.64 C8.2 ; 526.295,320.421 527.438,321.564 527.685,321.564 ; Q20.1 523.494,201.549 516.128,194.183 516.128,163.83 531.114,148.844 653.796,148.844 Q23.1 ; C2.-@527.177,257.556 523.875,257.556 ; DZ4.1 v2(533.908,267.589) 523.875,257.556 ; C6.- 534.543,299.212 536.956,301.625 C9.2@537.21,301.625 ; C4.1@545.084,219.329 C3.1 562.864,219.329 C1.1 ; 549.402,219.456 C7.- ; U2.2@555.879,321.183 555.879,321.945 ; 581.152,322.072 581.406,322.072 P2.7@583.057,320.421
  Bottom Layer w2: 515.021,320.421 ccw(c515.021,317.881) 513.225,319.677 510.903,317.355 ccw(c512.699,315.559) 510.159,315.559 510.159,294.422 ccw(c512.699,294.422) 510.903,292.626 513.352,290.177 ccw(c515.148,291.973) 515.148,289.433 532.712,289.433 cw(c532.712,288.999) 533.019,289.306 ; 515.282,320.421 526.295,320.421 ; 533.019,296.418 533.019,289.306 ; DZ4.1 DZ3.1 DZ1.1 533.908,282.956 533.019,283.845 533.019,289.306
M1: D1.A Q6.2 REL4.2 | length 20.3
  Bottom Layer w0.5: Q6.2 646.938,307.594 647.954,308.61 658.24,308.61 D1.A
  Bottom Layer w2: D1.A REL4.2@664.199,306.059
M2: D2.A Q7.2 REL7.2 | length 19.5
  Bottom Layer w0.5: Q7.2 646.684,295.656 647.319,296.291 659.637,296.291 D2.A
  Bottom Layer w2: D2.A REL7.2@664.326,295.01
M3: D3.A Q8.2 REL11.2 | length 18.6
  Bottom Layer w0.5: Q8.2 646.938,283.591 648.081,284.734 659.764,284.734 D3.A
  Bottom Layer w2: D3.A REL11.2@664.199,283.58
M4: D4.A Q9.2 REL16.2 | length 18.3
  Bottom Layer w0.5: Q9.2 646.938,269.875 648.462,271.399 657.605,271.399 D4.A
  Bottom Layer w2: D4.A REL16.2@663.564,269.61
M5: D5.A Q10.2 REL20.2 | length 18
  Bottom Layer w0.5: Q10.2 646.938,256.794 648.843,258.699 658.621,258.699 D5.A
  Bottom Layer w2: D5.A REL20.2@663.183,257.291
M6: D6.A Q11.2 REL24.2 | length 17.8
  Bottom Layer w0.5: Q11.2 647.319,245.872 648.97,247.523 658.875,247.523 D6.A
  Bottom Layer w2: D6.A REL24.2@663.691,246.369
M7: D7.A Q13.2 REL3.2 | length 21.2
  Bottom Layer w0.3: 584.454,194.542 D7.A 586.613,196.701 586.613,201.549 586.105,202.057 Q13.2
  Bottom Layer w2: 584.454,194.542 584.454,187.198 586.359,185.293 REL3.2
M8: D8.A Q14.2 REL8.2 | length 19.4
  Bottom Layer w0.3: Q14.2 575.056,202.311 575.945,201.422 575.945,196.32 D8.A
  Bottom Layer w2: REL8.2 D8.A@575.183,195.558
M9: D9.A Q15.2 REL12.2 | length 20.7
  Bottom Layer w0.3: D9.A 565.404,198.733 565.404,201.803 564.388,202.819 Q15.2
  Bottom Layer w2: REL12.2@563.129,184.542 D9.A
M10: D10.A Q16.2 REL15.2 | length 18.5
  Bottom Layer w0.5: Q16.2 646.938,233.807 647.954,234.823 659.256,234.823 D10.A
  Bottom Layer w2: D10.A 663.564,234.05 REL15.2
M11: D11.A Q17.2 REL19.2 | length 19.7
  Bottom Layer w0.5: Q17.2 646.938,222.123 648.208,223.393 657.097,223.393 D11.A
  Bottom Layer w2: D11.A 663.31,220.842 REL19.2
M12: D12.A Q18.2 REL23.2 | length 18
  Bottom Layer w0.5: Q18.2 647.319,209.042 648.589,210.312 658.748,210.312 D12.A
  Bottom Layer w2: D12.A 663.183,209.031 REL23.2
M13: D13.A Q21.2 REL2.2 | length 38.8
  Bottom Layer w0.5: Q21.2 652.907,190.119 652.907,183.007 653.796,182.118 656.336,182.118 657.352,183.134 657.352,195.725 D13.A
  Bottom Layer w2: D13.A 663.43,197.884 REL2.2
M14: D14.A Q22.2 REL6.2 | length 18
  Bottom Layer w0.5: Q22.2 651.51,178.943 652.272,178.181 657.733,178.181 659.511,179.959 D14.A
  Bottom Layer w2: D14.A 661.688,183.279 REL6.2
M15: D15.A Q23.2 REL10.2 | length 27.2
  Top Layer w0.5: v1(659.13,158.369) 659.892,159.131 D15.A
  Top Layer w2: D15.A 659.892,168.148 663.702,171.958 REL10.2
  Bottom Layer w0.5: Q23.2 656.59,155.575 659.384,158.369 v1(659.13,158.369)
M16: D16.A Q24.2 REL14.2 | length 20
  Bottom Layer w0.5: D16.A 553.847,199.241 553.847,201.295 552.831,202.311 Q24.2
  Bottom Layer w2: REL14.2@551.064,185.05 D16.A
M17: D17.A Q25.2 REL18.2 | length 20.9
  Bottom Layer w0.5: Q25.2 540.004,203.581 541.147,202.438 541.147,198.987 D17.A
  Bottom Layer w2: REL18.2 539.369,197.209 D17.A
M18: D18.A Q20.2 REL22.2 | length 20.6
  Bottom Layer w0.5: Q20.2 527.177,203.581 528.193,202.565 528.32,202.565 528.32,198.352 D18.A
  Bottom Layer w2: D18.A 527.939,195.96 REL22.2
M19: D19.A Q19.2 REL1.2 | length 22.2
  Bottom Layer w0.5: Q19.2 648.843,201.549 654.823,195.569 D19.A@654.823,194.563
  Bottom Layer w2: REL1.2@654.95,184.393 D19.A D19.A@654.95,195.569
M20: D20.A Q12.2 REL5.2 | length 18.8
  Bottom Layer w0.5: Q12.2 639.847,200.787 643.647,196.988 D20.A
  Bottom Layer w2: REL5.2@643.647,184.393 D20.A
M21: D21.A Q5.2 REL9.2 | length 19.2
  Bottom Layer w0.5: Q5.2 631.317,201.93 632.841,200.406 632.841,197.209 D21.A
  Bottom Layer w2: D21.A 632.333,195.96 REL9.2
M22: D22.A Q4.2 REL13.2 | length 19.1
  Bottom Layer w0.5: Q4.2 621.538,200.025 621.538,197.59 D22.A
  Bottom Layer w2: REL13.2@619.644,185.155 D22.A
M23: D23.A Q3.2 REL17.2 | length 20.9
  Bottom Layer w0.5: Q3.2 607.822,202.565 610.235,200.152 610.235,197.844 D23.A
  Bottom Layer w2: D23.A@608.076,195.685 608.076,185.293 REL17.2
M24: D24.A Q2.2 REL21.2 | length 20
  Bottom Layer w0.3: D24.A 598.043,197.717 598.043,200.533 Q2.2
  Bottom Layer w2: D24.A@595.503,195.177 595.503,186.436 REL21.2
MF1: REL4.3 T1.1 | length 25.8
  Top Layer w1: REL4.3 675.005,303.403 696.087,303.403 T1.1@696.468,303.022
MF2: REL7.3 T1.3 | length 26.2
  Top Layer w1: REL7.3 674.751,292.227 696.595,292.227 T1.3
MF3: REL11.3 T1.5 | length 26.5
  Top Layer w1: REL11.3 674.624,281.051 695.579,281.051 T1.5
MF4: REL16.3 T2.1 | length 26.1
  Top Layer w1: REL16.3 674.116,266.954 695.706,266.954 T2.1
MF5: REL20.3 T2.3 | length 26.9
  Top Layer w1: REL20.3 674.243,254.889 692.404,254.889 694.69,257.175 T2.3
MF6: REL24.3 T2.5 | length 27.3
  Top Layer w1: REL24.3 674.116,243.586 690.88,243.586 694.309,247.015 T2.5
MF7: REL3.3 T5.1 | length 23.5
  Top Layer w1: REL3.3 583.565,173.99 583.565,163.449 587.629,159.385 T5.1
MF8: REL8.3 T5.3 | length 21.2
  Top Layer w1: REL8.3 572.516,174.117 572.516,163.703 577.469,158.75
MF9: REL12.3 T5.5 | length 23
  Top Layer w1: REL12.3 562.356,176.911 560.578,175.133 560.578,164.973 T5.5@567.309,158.242
MF10: REL15.3 T6.1 | length 26
  Top Layer w1: REL15.3 671.322,233.807 673.735,231.394 T6.1
MF11: REL19.3 T6.3 | length 26.9
  Top Layer w1: REL19.3 673.735,218.567 689.864,218.567 692.531,221.234 T6.3
MF12: REL23.3 T6.5 | length 27.6
  Top Layer w1: REL23.3 674.116,206.756 684.784,206.756 689.102,211.074 T6.5
MF13: REL2.3 T3.1 | length 24.7
  Top Layer w1: REL2.3 673.862,195.072 T3.1@694.817,195.072
MF14: REL6.3 T3.3 | length 26.5
  Top Layer w1: REL6.3 674.243,182.372 685.165,182.372 688.213,185.42 T3.3
MF15: REL10.3 T3.5 | length 26.9
  Top Layer w1: REL10.3 673.989,170.815 686.689,170.815 691.134,175.26 T3.5
MF16: REL14.3 T4.1 | length 25.4
  Top Layer w1: REL14.3 548.259,174.625 548.259,164.592 555.752,157.099 T4.1
MF17: REL18.3 T4.3 | length 26.1
  Top Layer w1: REL18.3 536.575,174.498 536.575,165.481 545.592,156.464 T4.3
MF18: REL22.3 T4.5 | length 30
  Top Layer w1: REL22.3 524.256,173.863 524.256,164.465 527.939,160.782 532.003,160.782 535.432,157.353 T4.5
MF19: REL1.3 T7.1 | length 21.9
  Top Layer w1: T7.1 652.526,158.75 652.526,173.863 REL1.3
MF20: REL5.3 T7.3 | length 20.1
  Top Layer w1: T7.3@641.223,157.607 641.223,174.117 REL5.3
MF21: REL9.3 T7.5 | length 21.3
  Top Layer w1: T7.5 629.666,156.972 629.666,173.99 REL9.3
MF22: REL13.3 T8.1 | length 22.2
  Top Layer w1: T8.1 617.728,156.972 617.728,174.117 REL13.3
MF23: REL17.3 T8.3 | length 22.9
  Top Layer w1: T8.3 608.457,159.258 606.044,161.671 606.044,173.863 REL17.3
MF24: REL21.3 T8.5 | length 22.9
  Top Layer w1: REL21.3 595.249,174.498 595.249,162.814 598.297,159.766 T8.5
MN1: REL4.4 T1.2 | length 27.6
  Top Layer w1: REL4.4 674.878,301.498 691.515,301.498 695.452,297.561 T1.2
MN2: REL7.4 T1.4 | length 27.4
  Top Layer w1: REL7.4 671.957,287.782 674.37,290.195 694.055,290.195 T1.4
MN3: REL11.4 T1.6 | length 27.3
  Top Layer w1: REL11.4 671.957,276.479 674.751,279.273 692.912,279.273 694.944,277.241 T1.6
MN4: REL16.4 T2.2 | length 26.9
  Top Layer w1: REL16.4 673.989,264.795 691.769,264.795 694.309,262.255 T2.2
MN5: REL20.4 T2.4 | length 26.4
  Top Layer w1: REL20.4 671.449,250.19 674.37,253.111 694.182,253.111 695.198,252.095 T2.4
MN6: REL24.4 T2.6 | length 26.1
  Top Layer w1: REL24.4 674.243,241.681 695.833,241.681 T2.6
MN7: REL3.4 T5.2 | length 22.3
  Top Layer w1: REL3.4 578.739,176.53 581.152,174.117 581.152,157.48 T5.2
MN8: REL8.4 T5.4 | length 22.7
  Top Layer w1: REL8.4 570.484,173.863 570.484,161.925 572.389,160.02 T5.4
MN9: REL12.4 T5.6 | length 23.6
  Top Layer w1: REL12.4 558.292,174.117 558.292,163.449 562.229,159.512 T5.6
MN10: REL15.4 T6.2 | length 27.2
  Top Layer w1: REL15.4 671.322,226.822 673.862,229.362 692.023,229.362 695.071,226.314 T6.2
MN11: REL19.4 T6.4 | length 26.1
  Top Layer w1: REL19.4 674.116,216.408 695.706,216.408 T6.4
MN12: REL23.4 T6.6 | length 26.3
  Top Layer w1: REL23.4 671.449,201.93 674.116,204.597 689.356,204.597 690.753,205.994 T6.6
MN13: REL2.4 T3.2 | length 26.3
  Top Layer w1: REL2.4 673.989,192.913 691.769,192.913 694.182,190.5 T3.2
MN14: REL6.4 T3.4 | length 25.2
  Top Layer w1: REL6.4 671.449,177.673 674.243,180.467 695.198,180.467 T3.4
MN15: REL10.4 T3.6 | length 25.9
  Top Layer w1: REL10.4 671.322,166.116 673.989,168.783 693.928,168.783 T3.6
MN16: REL14.4 T4.2 | length 24.3
  Top Layer w1: REL14.4 543.433,177.292 545.973,174.752 545.973,162.941 550.672,158.242 T4.2
MN17: REL18.4 T4.4 | length 24.8
  Top Layer w1: REL18.4 534.543,174.498 534.543,163.83 540.512,157.861 T4.4
MN18: REL22.4 T4.6 | length 30.5
  Top Layer w1: REL22.4 517.017,174.244 517.017,165.735 526.669,156.083 T4.6
MN19: REL1.4 T7.2 | length 23.3
  Top Layer w1: T7.2 650.494,161.798 650.494,173.609 REL1.4
MN20: REL5.4 T7.4 | length 22.6
  Top Layer w1: T7.4 638.683,160.147 638.683,173.99 636.143,176.53 REL5.4
MN21: REL9.4 T7.6 | length 22.3
  Top Layer w1: REL9.4 624.713,176.149 627.507,173.355 627.507,159.131 T7.6
MN22: REL13.4 T8.2 | length 22.8
  Top Layer w1: REL13.4 612.775,176.53 615.696,173.609 615.696,158.242 T8.2
MN23: REL17.4 T8.4 | length 22
  Top Layer w1: REL17.4 601.345,176.276 603.885,173.736 603.885,156.591 T8.4
MN24: REL21.4 T8.6 | length 22.1
  Top Layer w1: REL21.4 593.217,173.482 T8.6
N: REL1.7 REL2.7 REL3.7 REL4.7 REL5.7 REL6.7 REL7.7 REL8.7 REL9.7 REL10.7 REL11.7 REL12.7 REL13.7 REL14.7 REL15.7 REL16.7 REL17.7 REL18.7 REL19.7 REL20.7 REL21.7 REL22.7 REL23.7 REL24.7 T9.3 | length 467.8
  Bottom Layer w2: REL22.7 520.319,163.576 521.97,161.925 ; 521.906,161.862 522.478,161.29 531.749,161.29 531.749,165.862 ; 532.257,161.29 543.052,161.29 ; REL14.7 543.306,161.544 543.052,161.29 ; 555.498,161.417 REL12.7 ; 567.563,161.417 REL8.7 ; 578.739,161.798 REL3.7 ; REL21.7 589.915,161.29 ; 601.345,161.671 REL17.7 ; 612.775,161.798 REL13.7 ; 624.713,161.417 REL9.7 ; 636.143,161.544 REL5.7 ; 647.573,161.925 REL1.7 ; REL19.7 689.483,213.487 ; 681.482,161.798 REL10.7 ; REL6.7 689.102,177.673 ; REL2.7@681.482,189.992 689.356,189.992 ; REL23.7 688.848,201.93 ; REL15.7 689.102,226.568 ; REL20.7 689.483,250.19 ; REL16.7 689.229,262.128 ; REL24.7@681.863,238.76 689.102,238.76 ; REL11.7 689.229,276.098 ; REL4.7 689.483,298.704 ; REL7.7@682.371,287.147 689.61,287.147 ; T9.3 689.61,287.147 ; 543.052,161.29 589.915,161.29 ; 589.915,161.29 686.054,161.29 689.61,164.846 689.61,287.147
NC: J2.1 J2.2 S100.3 | length 20.6
  Bottom Layer w1: J2.1 528.574,309.703 532.511,313.64 532.511,315.341 534.035,316.865 536.689,316.865 538.131,318.307 S100.3
  Bottom Layer w3: J2.2 J2.1@526.574,309.311
NetC3_2: C3.2 U1.23 X1.2 | length 16.8
  Bottom Layer w0.3: U1.23@544.23,236.104 544.438,236.104 549.126,231.416 550.912,231.416
  Bottom Layer w1: 550.912,231.416 550.912,227.09 553.568,224.434 C3.2
NetC4_2: C4.2 U1.24 X1.1 | length 13.8
  Bottom Layer w0.3: U1.24@544.182,235.318 544.182,235.09 547.751,231.521 547.751,228.219
  Bottom Layer w1: C4.2@545.338,223.901 545.338,225.73 547.751,228.143
NetD29_K: D29.K D30.A | length 4.3
  Bottom Layer w1: D30.A D29.K
NetD31_A: D31.A D32.A S100.2 | length 12.2
  Bottom Layer w1: D32.A@535.795,310.261 535.795,314.198 536.702,314.198 540.131,317.627 S100.2
NetJ1_4: J1.4 U1.51 | length 16.3
  Bottom Layer w0.3: J1.4 513.63,243.501 528.743,243.501 529.28,242.963 U1.51@529.451,242.963
NetJ1_5: J1.5 U1.50 | length 16.7
  Bottom Layer w0.3: J1.5 518.012,240.792 520.155,242.935 528.348,242.935 528.886,242.397 U1.50@528.715,242.397
NetJ1_6: J1.6 U1.49 | length 16.7
  Bottom Layer w0.3: J1.6 516.255,238.252 520.319,242.316 527.836,242.316 U1.49@528.32,241.832
NetJ1_11: J1.11 U1.47 | length 21.2
  Bottom Layer w0.3: J1.11 516.14,225.552 U1.47
NetJ1_12: J1.12 U1.46 | length 23.3
  Bottom Layer w0.3: J1.12@514.096,223.012 J1.12 514.731,223.012 U1.46
NetJ1_13: J1.13 U1.45 | length 24.8
  Bottom Layer w0.3: J1.13 514.604,220.472 516.52,222.388 516.52,223.658 528.828,235.966 528.828,235.977 U1.45
NetJ1_14: J1.14 U1.44 | length 27
  Bottom Layer w0.3: J1.14@513.969,218.44 J1.14 517.398,221.869 517.398,223.416 U1.44
NetJ1_16: J1.16 Q1.2 | length 8.7
  Bottom Layer w0.3: J1.16 J1.16@514.223,212.852
  Bottom Layer w1: J1.16 514.479,212.852 519.305,217.678 Q1.2
NetQ1_3: Q1.3 R2.2 | length 2.4
  Bottom Layer w1: Q1.3 R2.2
NetQ2_3: Q2.3 R1.2 | length 2.8
  Bottom Layer w1: R1.2 595.884,204.724 Q2.3
NetQ3_3: Q3.3 R3.2 | length 3.4
  Bottom Layer w1: R3.2 607.314,207.264 Q3.3
NetQ4_3: Q4.3 R4.2 | length 3.2
  Bottom Layer w1: R4.2 619.125,207.518 Q4.3
NetQ5_3: Q5.3 R5.2 | length 2.2
  Bottom Layer w1: Q5.3 R5.2
NetQ6_3: Q6.3 R7.2 | length 2.2
  Bottom Layer w1: R7.2 Q6.3
NetQ7_3: Q7.3 R8.2 | length 2.1
  Bottom Layer w1: R8.2 644.271,294.259 Q7.3
NetQ8_3: Q8.3 R9.2 | length 1.9
  Bottom Layer w1: R9.2 Q8.3
NetQ9_3: Q9.3 R10.2 | length 2.4
  Bottom Layer w1: R10.2 642.874,269.621 Q9.3
NetQ10_3: Q10.3 R11.2 | length 2.2
  Bottom Layer w1: R11.2 642.874,256.413 Q10.3
NetQ11_3: Q11.3 R12.2 | length 2.5
  Bottom Layer w1: R12.2 642.747,245.872 Q11.3
NetQ12_3: Q12.3 R6.2 | length 3.7
  Bottom Layer w1: R6.2 638.048,203.835 Q12.3
NetQ13_3: Q13.3 R15.2 | length 3.3
  Bottom Layer w1: Q13.3 R15.2
NetQ14_3: Q14.3 R16.2 | length 3.6
  Bottom Layer w1: R16.2 574.04,207.391 Q14.3
NetQ15_3: Q15.3 R17.2 | length 3.2
  Bottom Layer w1: Q15.3 R17.2
NetQ16_3: Q16.3 R18.2 | length 2.8
  Bottom Layer w1: R18.2 644.525,232.537 Q16.3
NetQ17_3: Q17.3 R19.2 | length 2.6
  Bottom Layer w1: R19.2 644.779,220.599 Q17.3
NetQ18_3: Q18.3 R20.2 | length 2.8
  Bottom Layer w1: R20.2 643.509,210.439 Q18.3
NetQ19_3: Q19.3 R13.2 | length 2.1
  Bottom Layer w1: R13.2 646.811,203.073 Q19.3
NetQ20_3: Q20.3 R14.2 | length 2.4
  Bottom Layer w1: Q20.3 R14.2
NetQ21_3: Q21.3 R23.2 | length 11.1
  Top Layer w0.5: R23.2 640.878,192.786 Q21.3
NetQ22_3: Q22.3 R24.2 | length 18.9
  Bottom Layer w0.5: R24.2 631.317,179.578 Q22.3
NetQ23_3: Q23.3 R25.2 | length 2.8
  Bottom Layer w0.5: Q23.3 658.876,149.352 R25.2
NetQ24_3: Q24.3 R26.2 | length 4
  Bottom Layer w1: R26.2 551.688,207.772 Q24.3
NetQ25_3: Q25.3 R21.2 | length 2.3
  Bottom Layer w1: Q25.3 R21.2
NetR2_1: R2.1 U1.48 | length 12.2
  Bottom Layer w0.3: R2.1 521.613,232.156 U1.48
RES: P1.3 R22.2 U1.20 | length 41
  Top Layer w0.2: v1@536.892,242.887 535.813,243.967 535.813,260.985 R22.2 ; v1(541.02,238.887) 541.02,238.76 v1(543.306,241.046)
  Bottom Layer w0.2: v1(536.956,242.951) v1(541.02,238.887) ; v1(543.306,241.046) 543.306,240.549 U1.20
  Bottom Layer w1: R22.2@539.75,264.795 540.004,265.049 541.71,265.049 P1.3
SCK: P1.4 P2.2 U1.11 | length 101.1
  Bottom Layer w0.3: P1.4 551.688,251.479 551.688,251.089 ; U1.11 545.177,244.577 570.372,269.773 P2.2
SW1: P2.1 U1.10 | length 84.2
  Top Layer w0.3: v1(549.656,250.825) v1(552.704,253.873)
  Bottom Layer w0.3: U1.10 549.656,250.017 v1(549.656,250.825) ; v1(552.704,253.873) 552.704,254.127 567.832,269.255 P2.1
SW3: P2.3 U1.12 | length 87.1
  Bottom Layer w0.3: U1.12 573.151,271.249 573.151,319.269 P2.3
SW4: P2.4 U1.13 | length 88.3
  Bottom Layer w0.3: U1.13 546.308,243.446 575.452,272.59 P2.4
SW5: P2.5 U1.14 | length 89.7
  Bottom Layer w0.3: U1.14 577.85,273.685 577.85,319.366 P2.5
SW6: P2.6 U1.15 | length 91.1
  Bottom Layer w0.3: U1.15 547.451,242.143 580.532,275.224 P2.6
VCC: C1.2 C2.+ C6.+ C7.+ C8.1 C9.1 D25.2 D26.2 D27.2 D28.2 D29.A DZ1.2 DZ2.2 DZ3.2 DZ4.2 J1.2 J1.15 P1.2 P113.6 R22.1 U1.21 U1.52 U1.62 U1.64 U2.3 | length 281.3
  Top Layer w0.3: C2.+@522.043,251.26 522.043,248.612 522.024,248.593 525.38,245.237 v2(528.066,245.237)
  Top Layer w0.5: v3(530.479,255.143) 530.479,252.73 v3(530.606,252.603)
  Top Layer w2: v4(549.021,320.04) 549.021,298.45 ccw(c549.148,298.45) 549.148,298.323 v4(549.148,296.926)
  Bottom Layer w0.3: C2.+ 523.748,253.873 ; v2@528.632,244.914 U1.52@530.017,243.529 ; v3@530.606,252.73 532.257,252.73 U1.62 ; 530.86,256.667 531.114,256.413 531.114,256.159 538.099,249.174 538.099,244.602 547.37,235.331 552.958,235.331 554.79,233.499 C7.+
  Bottom Layer w1: J1.15 511.556,215.392 509.905,217.043 509.905,246.761 511.556,248.412 ; D25.2 D26.2 D27.2 D28.2 509.651,250.317 511.556,248.412 ; C8.1 542.163,294.513 C6.+ 542.163,298.831 C9.1 ; P1.2@544.304,266.047 540.603,269.748 540.41,269.748 ; R22.1 546.227,271.399 DZ4.2 540.41,269.748 ; P113.6 549.793,288.173 550.037,288.417 ; C7.+ 556.597,226.466 C1.2 ; 511.556,248.412 J1.2 518.287,248.412 C2.+ 524.764,254.889 529.59,254.889 531.114,256.413 531.749,257.048 531.749,261.087 540.41,269.748
  Bottom Layer w2: DZ4.2 DZ3.2 DZ1.2 542.061,283.616 543.814,285.369 543.814,295.402 C6.+@542.671,296.545 ; C6.+ ccw(c542.671,297.053) C6.+@542.671,296.545 ; v4@548.653,319.799 U2.3@553.352,319.799 ; v4(549.148,296.926) cw(c548.767,296.926) 548.767,296.545 C6.+@542.671,296.545
pads on no net: J1.7 J1.8 J1.9 J1.10 REL1.6 REL1.8 REL2.6 REL2.8 REL3.6 REL3.8 REL4.6 REL4.8 REL5.6 REL5.8 REL6.6 REL6.8 REL7.6 REL7.8 REL8.6 REL8.8 REL9.6 REL9.8 REL10.6 REL10.8 REL11.6 REL11.8 REL12.6 REL12.8 REL13.6 REL13.8 REL14.6 REL14.8 REL15.6 REL15.8 REL16.6 REL16.8 REL17.6 REL17.8 REL18.6 REL18.8 REL19.6 REL19.8 REL20.6 REL20.8 REL21.6 REL21.8 REL22.6 REL22.8 REL23.6 REL23.8 REL24.6 REL24.8 S100.1 S100.M2 T9.2 U1.1 U1.18 U1.19 U1.33 U1.34 U1.41 U1.42 U1.43 U2.0

## Polygon pours and split planes (outlines as drawn)
GND on Top Layer "Mechanical 1-No Net" (hatched 45Degree grid 0.508 track 0.203, pour order 2): 509.269,318.592 511.426,320.84 514.472,322.482 518.152,322.963 521.959,322.963 664.597,322.963 671.323,323.088 672.973,318.967 672.973,311.974 669.293,310.225 666.882,305.48 666.501,184.222 658.379,181.1 507.492,180.975 507.365,313.722 508.126,315.97 508.907,318.047 509.476,318.91
GND on Bottom Layer "Mechanical 1-No Net" (hatched 45Degree grid 0.508 track 0.203, pour order 4): 508.381,317.373 510.38,320.022 512.441,321.621 514.858,322.834 516.396,322.906 517.525,323.088 520.7,322.961 671.576,323.088 672.973,319.659 673.1,312.039 669.29,310.261 666.877,305.308 667.512,184.531 668.909,184.277 658.114,180.848 507.238,180.721 507.238,313.69 508.381,317.373

## Other copper
Top Layer:
  text ".:R2T Company:." at 637.794,314.325 h5
  text ".:R2T Company:." at 573.786,271.526 h5 r90
  text ".:R2T Company:." at 584.073,245.872 h5
  text "X-Compressor" at 586.359,239.903 h5
  text "By Ehsan Shaghaei" at 581.152,233.807 h5
  text "Ehsan2754@yahoo.com,R2T.ir" at 569.595,227.584 h5
  text "18-oct-2015,3.41AM" at 580.136,221.615 h5
Bottom Layer:
  rectangle net GND: 526.923,313.436 529.971,322.199
  rectangle net VCC: 539.623,288.417 550.037,302.133
  rectangle net GND: 520.573,288.544 537.083,302.133
  region net SCK: 551.688,251.479 551.961,251.479 551.688,251.479 551.796,251.587 552.186,251.587 551.815,251.216 551.688,251.343
  region net VCC: 509.143,250.317 509.27,250.19 509.397,246.126 511.302,248.158 509.397,250.063 509.397,250.444
  region net GND: 527.567,261.084 528.542,258.159 527.05,256.667 523.367,256.667

## Silkscreen, mask and mechanical layers (free items; w line width, h text height)
Mechanical 1:
  lines w0.254: 507.468,152.438 507.492,156.21 507.496,314.006 508.306,317.028 509.905,319.405 511.563,321.051 513.374,322.096 515.362,322.743 517.144,322.961 518.287,322.834 623.697,323.088 651.764,323.088 693.928,323.088 698.881,322.961 700.026,322.607 700.786,322.453 701.675,322.072 702.88,321.336 704.132,320.393 705.202,319.246 706.247,317.754 706.952,316.051 707.304,314.523 707.517,312.674 707.39,310.007 707.517,306.197 707.39,155.829 707.39,152.019 707.222,150.882 706.952,149.871 706.101,147.961 705.104,146.431 704.132,145.53 702.691,144.399 701.02,143.638 699.52,143.18 697.964,142.988 696.214,143.129 695.579,143.002 524.129,142.875 518.795,143.002 516.918,142.988 515.362,143.18 514.351,143.45 512.907,144.063 511.563,144.871 510.38,145.9 509.066,147.522 508.306,148.894 507.66,150.882 507.468,152.438

## Text inside footprints (layer, text, board x,y; h text height)
C2: Top Overlay "-" at 525.635,258.634 h1.27 r45; Top Overlay "+" at 520.247,253.245 h1.27 r45
C5: Top Overlay "-" at 522.478,298.958 h1.27; Top Overlay "+" at 514.858,298.958 h1.27
C6: Top Overlay "-" at 535.051,295.021 h1.27 r180; Top Overlay "+" at 542.671,295.021 h1.27 r180
C7: Top Overlay "-" at 551.198,221.807 h1.27 r225; Top Overlay "+" at 556.586,227.196 h1.27 r225
Q1: Top Overlay "3" at 517.525,219.151 h0.7 r270; Top Overlay "1" at 517.62,216.383 h0.7 r270
Q2: Top Overlay "3" at 594.233,203.911 h0.7 r270; Top Overlay "1" at 594.328,201.143 h0.7 r270
Q3: Top Overlay "3" at 605.409,204.038 h0.7 r270; Top Overlay "1" at 605.504,201.27 h0.7 r270
Q4: Top Overlay "3" at 617.22,203.911 h0.7 r270; Top Overlay "1" at 617.315,201.143 h0.7 r270
Q5: Top Overlay "3" at 629.031,203.403 h0.7 r270; Top Overlay "1" at 629.126,200.635 h0.7 r270
Q6: Top Overlay "3" at 645.465,304.165 h0.7; Top Overlay "1" at 648.233,304.26 h0.7
Q7: Top Overlay "3" at 645.211,292.735 h0.7; Top Overlay "1" at 647.979,292.83 h0.7
Q8: Top Overlay "3" at 645.465,281.305 h0.7; Top Overlay "1" at 648.233,281.4 h0.7
Q9: Top Overlay "3" at 645.465,267.716 h0.7; Top Overlay "1" at 648.233,267.811 h0.7
Q10: Top Overlay "3" at 645.465,254.508 h0.7; Top Overlay "1" at 648.233,254.603 h0.7
Q11: Top Overlay "3" at 645.592,243.967 h0.7; Top Overlay "1" at 648.36,244.062 h0.7
Q12: Top Overlay "3" at 637.159,202.26 h0.7 r270; Top Overlay "1" at 637.254,199.492 h0.7 r270
Q13: Top Overlay "3" at 582.549,203.53 h0.7 r270; Top Overlay "1" at 582.644,200.762 h0.7 r270
Q14: Top Overlay "3" at 572.135,203.784 h0.7 r270; Top Overlay "1" at 572.23,201.016 h0.7 r270
Q15: Top Overlay "3" at 561.467,204.292 h0.7 r270; Top Overlay "1" at 561.562,201.524 h0.7 r270
Q16: Top Overlay "3" at 645.465,231.013 h0.7; Top Overlay "1" at 648.233,231.108 h0.7
Q17: Top Overlay "3" at 645.465,218.821 h0.7; Top Overlay "1" at 648.233,218.916 h0.7
Q18: Top Overlay "3" at 645.846,206.756 h0.7; Top Overlay "1" at 648.614,206.851 h0.7
Q19: Top Overlay "3" at 645.414,203.022 h0.7 r270; Top Overlay "1" at 645.509,200.254 h0.7 r270
Q20: Top Overlay "3" at 524.637,205.054 h0.7 r270; Top Overlay "1" at 524.732,202.286 h0.7 r270
Q21: Bottom Overlay "3" at 646.303,193.345 h0.7 r270; Bottom Overlay "1" at 646.398,196.113 h0.7 r270
Q22: Bottom Overlay "3" at 650.037,181.483 h0.7 r180; Bottom Overlay "1" at 652.805,181.388 h0.7 r180
Q23: Top Overlay "3" at 658.063,151.511 h0.7 r180; Top Overlay "1" at 655.295,151.416 h0.7 r180
Q24: Top Overlay "3" at 549.783,203.784 h0.7 r270; Top Overlay "1" at 549.878,201.016 h0.7 r270
Q25: Top Overlay "3" at 537.083,205.054 h0.7 r270; Top Overlay "1" at 537.178,202.286 h0.7 r270